# Altium PCB 大松PCB1.PcbDoc
Units mil, origin at the board's own origin, x right, y up, seen from the top; angles counter-clockwise.
Board outline 3425.03 x 1845.03 mil, 2 copper layers (Top Layer, Bottom Layer); 49 components, 33 nets, 134 pads, 200 vias.
Unrouted connection lines stored in the file: 28.
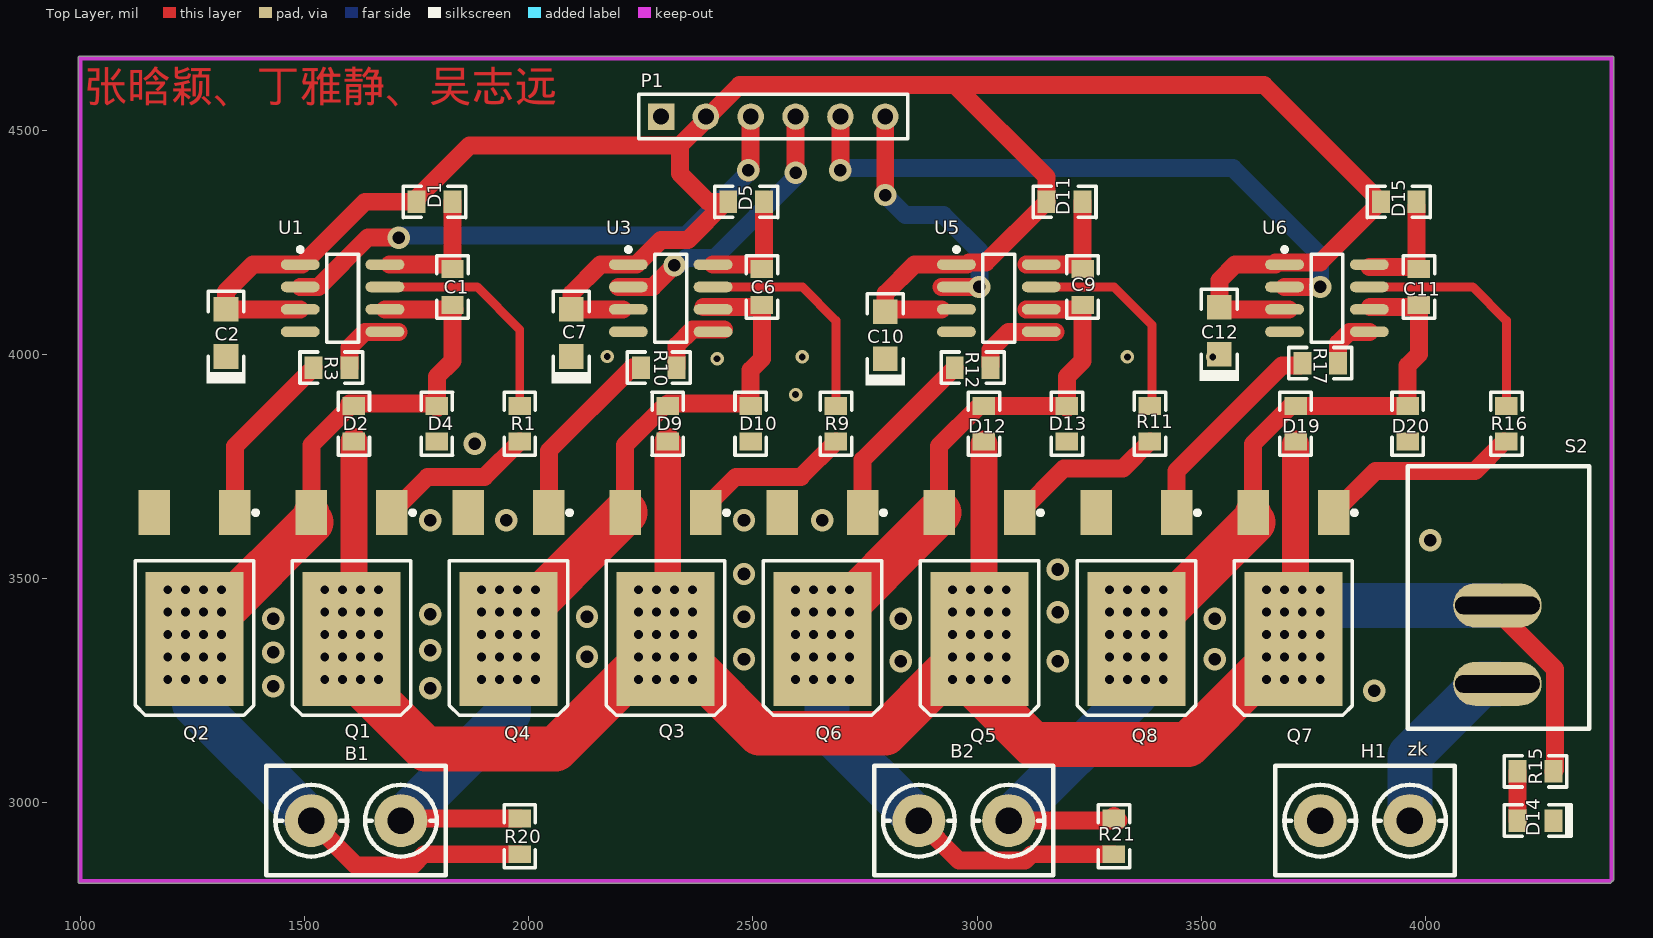
[diagram p0: Top Layer view]
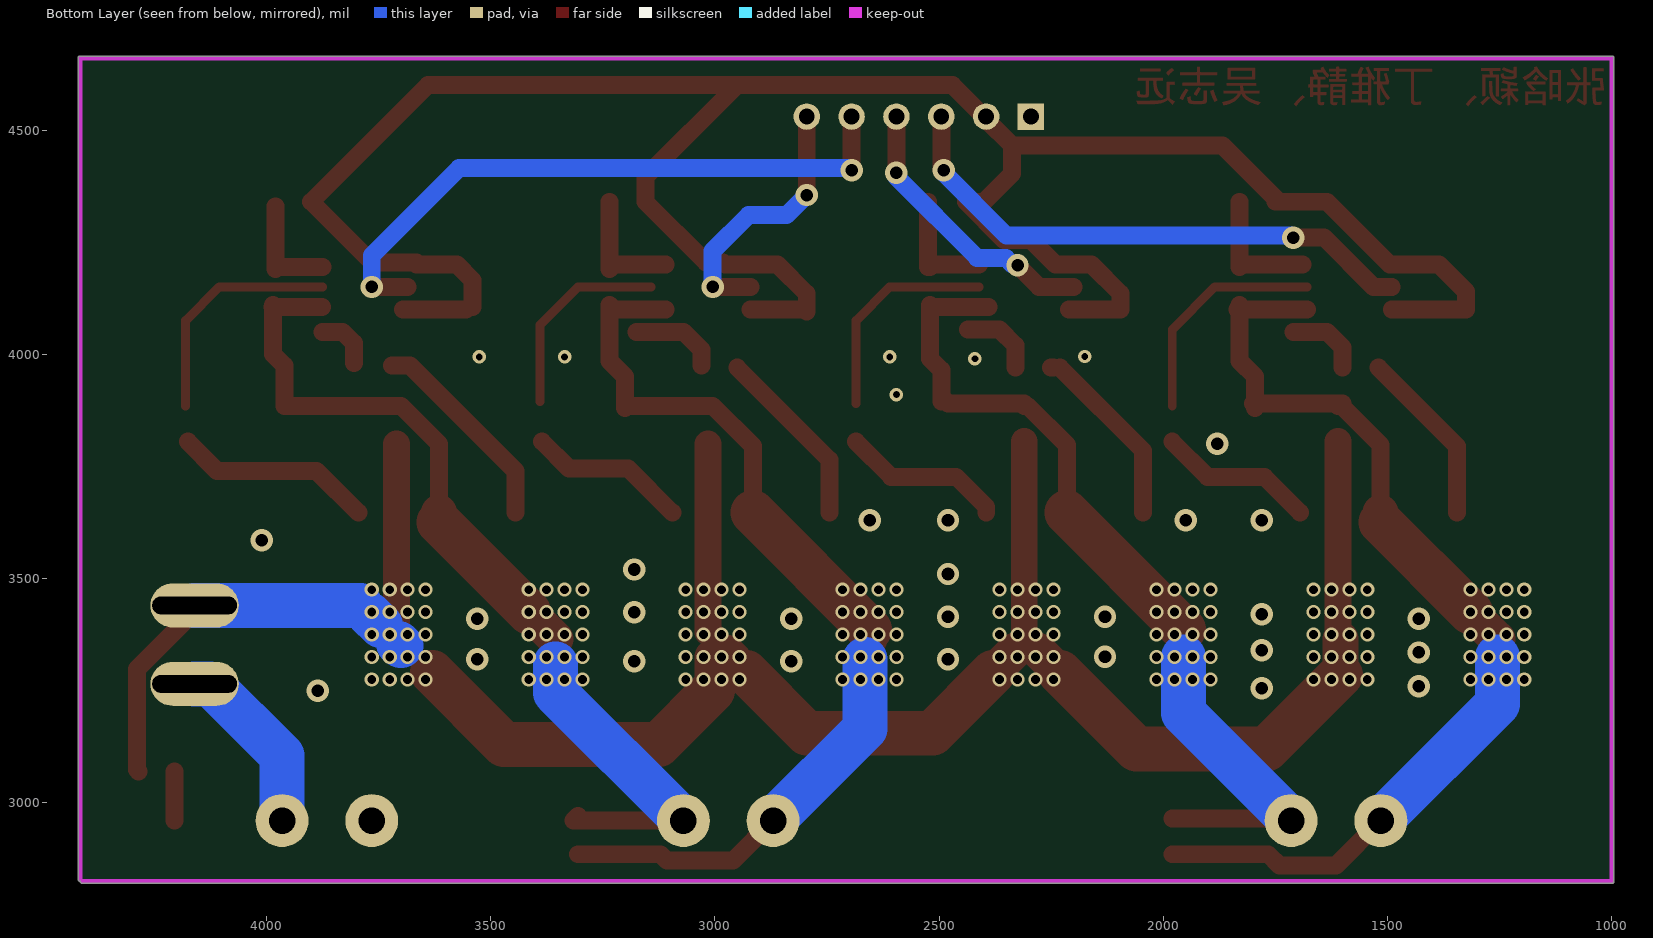
[diagram p1: Bottom Layer view, seen from below]

## Layer stack, top to bottom
Top Layer: signal copper 1.4
Dielectric: dielectric 12.6, FR-4, Dk 4.8
Bottom Layer: signal copper 1.4

## Board outline
1000,2819.99 cw(c1000,2825) 994.99,2825 994.99,4660 cw(c1000,4660) 1000,4665.02 4415,4665.02 cw(c4415,4660) 4420.02,4660 4420.02,2830 cw(c4415,2830) 4418.53,2826.44 cw(c4415,2830) 4415.02,2824.99 cw(c4410,2825) 4413.56,2821.47 cw(c4410,2825) 4410,2819.99

## Design rules (kind name [scope] priority, off if disabled: settings)
Clearance [All] p1: gap=10
PolygonConnect [All] p1: connectstyle=Relief reliefconductorwidth=10 reliefentries=4 polygonreliefangle="90 Angle" airgapwidth=10
RoutingVias [All] p1: holewidth=28 width=50 viastyle="Through Hole" minholewidth=28 minwidth=50 maxholewidth=28 maxwidth=50
SolderMaskExpansion [All] p1: expansion=4
Width [All] p1: maxlimit=100 minlimit=1 preferedwidth=10 minimp=50.000000 maximp=50.000000 favimp=50.000000
28 further rules are at their usual default settings.

## Components (designator, comment, footprint, x,y, rotation, side; value= is the part's Value field where it differs from the comment)
B1 "Motor" KF301-2P 1615,2960 r270 top
B2 "Motor" KF301-2P 2970,2960 r270 top
C1 "Cap" 0805(2012) 1830,4150 r270 top
C2 "Cap Pol1" SOD-323(0805) 1325,4045 r270 top
C6 "Cap" 0805(2012) 2520,4150 r270 top
C7 "Cap Pol1" SOD-323(0805) 2095,4045 r270 top
C9 "Cap" 0805(2012) 3235,4150 r270 top
C10 "Cap Pol1" SOD-323(0805) 2795,4040 r270 top
C11 "Cap" 0805(2012) 3985,4150 r270 top
C12 "Cap Pol1" SOD-323(0805) 3540,4050 r270 top
D1 "1N5819" 0805(2012) 1790,4340 r180 top
D2 "1N5819" 0805(2012) 1610,3845 r90 top
D4 "1N5819" 0805(2012) 1795,3845 r270 top
D5 "1N5819" 0805(2012) 2485,4340 r180 top
D9 "1N5819" 0805(2012) 2310,3845 r90 top
D10 "1N5819" 0805(2012) 2495,3845 r270 top
D11 "1N5819" 0805(2012) 3195,4340 r180 top
D12 "1N5819" 0805(2012) 3015,3845 r90 top
D13 "1N5819" 0805(2012) 3200,3845 r270 top
D14 "RED" 0805LED 4245,2960 r0 top
D15 "1N5819" 0805(2012) 3940,4340 r180 top
D19 "1N5819" 0805(2012) 3710,3845 r90 top
D20 "1N5819" 0805(2012) 3960,3845 r270 top
H1 "POWER IN" KF301-2P 3865,2960 r270 top
P1 "PWM" HDR1X6 2295,4530 r0 top
Q1 "IR7843" LR7843 1605,3505 r90 top
Q2 "IR7843" LR7843 1255,3505 r90 top
Q3 "IR7843" LR7843 2305,3505 r90 top
Q4 "IR7843" LR7843 1955,3505 r90 top
Q5 "IR7843" LR7843 3005,3505 r90 top
Q6 "IR7843" LR7843 2655,3505 r90 top
Q7 "IR7843" LR7843 3705,3505 r90 top
Q8 "IR7843" LR7843 3355,3505 r90 top
R1 "Res2" 0805(2012) 1980,3845 r270 top
R3 "Res2" 0805(2012) 1560,3970 r180 top
R9 "Res2" 0805(2012) 2685,3845 r270 top
R10 "Res2" 0805(2012) 2290,3970 r180 top
R11 "Res2" 0805(2012) 3385,3845 r270 top
R12 "Res2" 0805(2012) 2990,3970 r180 top
R15 "Res2" 0805(2012) 4245,3070 r180 top
R16 "Res2" 0805(2012) 4180,3845 r270 top
R17 "Res2" 0805(2012) 3765,3980 r180 top
R20 "Res Varistor" 0805 1980,2925 r270 top
R21 "Res Varistor" 0805 3305,2925 r270 top
S2 "zk" SWITCH 4365,3165 r180 top
U1 "IR2104S" IR2104S 1585,4125 r0 top
U3 "IR2104S" IR2104S 2316.67,4125 r0 top
U5 "IR2104S" IR2104S 3048.33,4125 r0 top
U6 "IR2104S" IR2104S 3780,4125 r0 top

## Footprints (in the part's own frame and the unit in brackets; to place one, negate y for a bottom-side part, rotate by r counter-clockwise, add the part's x,y. Pads: shape width x height; smd on the part's side, far side on the other; paste and mask are expansions set on the pad)
0805 [mil]
  rect 40x50 smd: 1(-40,0) 2(40,0)
  silkscreen extent -70,-35 70,35
0805(2012) [mil]
  rect 40x50 smd: 1(-40,0) 2(40,0)
  silkscreen extent -70,-35 70,35
0805LED [mil]
  rect 40x50 smd: 1(-40,0) 2(40,0)
  silkscreen extent -70,-35 80,35
HDR1X6 [mm] "Connector; Header; 6 Position"
  rect 1.5x1.5 hole 0.9: 1(0,0)
  round 1.5 hole 0.9: 2(2.54,0) 3(5.08,0) 4(7.62,0) 5(10.16,0) 6(12.7,0)
  silkscreen extent -1.27,-1.27 13.97,1.27
IR2104S [mm]
  oval 2.2x0.6 smd: 1(-2.4,1.905) 2(-2.4,0.635) 3(-2.4,-0.635) 4(-2.4,-1.905) 5(2.4,-1.905) 6(2.4,-0.635) 7(2.4,0.635) 8(2.4,1.905)
  silkscreen extent -2.52,-2.5 0.9,2.88, body extent -2,-2.5 2,2.5, height 1.55
KF301-2P [mm]
  round 3 hole 1.5: 1(0,-2.54) 2(0,2.54)
  silkscreen extent -3.1,-5.08 3.1,5.08
LR7843 [mm]
  rect 2.54x1.778 smd: 1(3.6,-2.28) 3(3.6,2.28)
  rect 7.6x5.55 smd: 2(-3.556,0)
  silkscreen extent -7.87,-3.58 3.72,3.35
SOD-323(0805) [mil]
  rect 55x55 smd: 1(-55,0) 2(50,0)
  silkscreen extent -95,-44 110,44
SWITCH [mm]
  oval 5x2.5 hole 1 slot 4.8 at 0 deg: 1(5.207,-2.54) 2(5.207,-6.985)
  silkscreen extent 0,-14.86 10.29,0

## Part data
B1 B2: library part "Motor Servo", "Servo Motor"
C1 C6 C9 C11: "Capacitor"
C2 C7 C10 C12: "Polarized Capacitor (Radial)"
D1 D2 D4 D5 D9 D10 D11 D12 D13 D15 D19 D20: library part 1N4148, "Silicon Epitaxial Planar Diode for Various Detector, Modulator, Demodulator"
D14: library part LED2, "Typical RED, GREEN, YELLOW, AMBER GaAs LED"
P1: library part "Header 6", "Header, 6-Pin"
Q1 Q2 Q3 Q4 Q5 Q6 Q7 Q8: "N-Channel Power MOSFET"
R1 R3 R9 R10 R11 R12 R15 R16 R17: "Resistor"
R20 R21: "Varistor (Voltage-Sensitive Resistor)"
S2: library part SW-SPST, "Single-Pole, Single-Throw Switch"

## Via types
v1: diameter 31.5, hole 19.68, Top Layer to Bottom Layer, 160 vias
v2: diameter 50, hole 28, Top Layer to Bottom Layer, 33 vias
v3: diameter 30, hole 15, Top Layer to Bottom Layer, 7 vias

## Nets (pads, with @x,y where several pads share a name; then routed paths per layer and width w, separated by ;. In a path a pad name is that pad's centre, name@x,y a point inside that pad or via, vN(x,y) a via of type N, cw(c..) or ccw(c..) an arc to the next point about the centre after c; other vN are vias at no path point)
12V: C2.1 C7.1 C10.1 C12.1 D1.2 D5.2 D11.2 D15.2 P1.2 U1.1 U1.3 U3.1 U3.3 U5.1 U5.3 U6.1 U6.3 | length 5444.3
  Top Layer w40: U1.3 C2.1 1325,4140 1385,4200 U1.1 1495,4200 1635,4340 D1.2 1750,4347.43 1868.05,4465.47 2336.95,4465.47 ; U3.3@2210.51,4100 C7.1 2095,4135 2160,4200 U3.1 2240,4200 2295,4255 2355,4255 2440,4340 2400,4340 2336.95,4403.05 2336.95,4465.47 ; U5.3@2920.51,4100 2800,4100 C10.1 2795,4135 2860,4200 U5.1 2977.22,4200 2982.22,4205 3020,4205 D11.2 3155,4395 2950,4600 ; C12.1 3540,4165 3575,4200 U6.1@3665,4200 ; C12.1@3555,4100 U6.3@3695.51,4100 ; U6.1@3665,4205 3765,4205 D15.2 3640,4600 2950,4600 ; 2336.95,4465.47 2395,4523.52 2395,4525 2470,4600 2950,4600
GND: C2.2 C7.2 C10.2 C12.2 D4.2 D10.2 D13.2 D14.2 D20.2 H1.1 P1.1 Q2.3 Q4.3 Q6.3 Q8.3 U1.4 U3.4 U5.4 U6.4
  other v2: 1780,3630 1950,3630 2480,3630 2655,3630 1880,3800
  other v3: 2595,3910 2420,3990 2610,3994 2610,3994 3335,3994 3525,3994 2175,3995
"MOTOR IN1": P1.6 U5.2 | length 598.3
  Top Layer w40: v2@2790,4355 2795,4360 P1.6@2795,4525 ; U5.2@2920.51,4150 v2(3005,4150)
  Bottom Layer w40: v2(2795,4355) 2840,4310 2925,4310 3005,4230 v2(3005,4150)
"MOTOR IN2": P1.5 U6.2 | length 1400.3
  Top Layer w40: v2@2695,4415 P1.5@2695,4525 ; U6.2 v2(3765,4150)
  Bottom Layer w40: v2@2705,4415 3570,4415 3765,4220 v2(3765,4150)
  other v2: 2695,4410
"MOTOR IN3": P1.4 U3.2 | length 617.9
  Top Layer w40: U3.2@2200,4150 U3.2 ; U3.2@2225,4150 2276.73,4150 v2(2325,4198.27) ; v2@2595,4410 P1.4@2595,4525
  Bottom Layer w40: v2@2325,4200 2336.14,4200 2351.14,4215 2415,4215 2595,4395 v2(2595,4405)
"MOTOR IN4": P1.3 U1.2 | length 1232.2
  Top Layer w40: U1.2 1531.14,4150 1641.14,4260 v2(1710,4260) ; v2@2490,4405 2495,4410 P1.3@2495,4525
  Bottom Layer w40: v2(1710,4260) 1715,4265 2350,4265 2490,4405 v2(2490,4410)
NetB1_1: B1.1 C1.2 D2.2 D4.1 Q1.3 Q2.2 R20.2 U1.6 | length 2260.9
  Top Layer w40: B1.1 1615,2860 1740.94,2860 1765.94,2885 R20.2 ; Q1.3 1515.24,3797.66 1602.57,3885 D2.2 ; D2.2@1600,3890 D4.1@1795,3890 ; U1.6 C1.2@1830,4100 ; D4.1@1795,3880 D4.1 D4.1@1795,3890 ; D4.1@1800,3890 D4.1@1795,3890 ; C1.2 C1.2@1830,4100 ; C1.2@1835,4100 C1.2@1830,4100 ; D4.1@1795,3890 1795,3950 1830,3985 C1.2@1830,4100
  Top Layer w80: Q2.2 v1(1315,3425) ; Q1.3@1515.24,3625.24 Q1.3
  Top Layer w100: v1(1315,3425) Q1.3@1515.24,3625.24
  Bottom Layer w100: 1255,3325 1255,3220 B1.1
  other v1: 1195,3275 1235,3275 1275,3275 1315,3275 1195,3325 1235,3325 1275,3325 1315,3325 1195,3375 1235,3375 1275,3375 1315,3375 1195,3425 1235,3425 1275,3425 1195,3475 1235,3475 1275,3475 1315,3475
NetB1_2: B1.2 C6.2 D9.2 D10.1 Q3.3 Q4.2 R20.1 U3.6 | length 1949.6
  Top Layer w40: B1.2 1720,2965 R20.1 ; Q3.3 2215,3646.97 2215,3797.43 2302.57,3885 D9.2@2305,3885 ; D9.2 D9.2@2305,3885 ; U3.6@2390,4105 C6.2@2520,4105 ; D10.1@2490,3900 2480,3890 2310,3890 D9.2@2305,3885 ; D10.1@2495,3895 2495,3965 2520,3990 C6.2@2520,4105 ; C6.2 C6.2@2520,4105
  Top Layer w80: Q4.2 Q4.2@1955,3386.5
  Top Layer w100: Q4.2@1955,3386.5 Q3.3
  Bottom Layer w100: B1.2 1955,3200 1955,3325
  other v1: 1895,3275 1935,3275 1975,3275 2015,3275 1895,3325 1935,3325 1975,3325 2015,3325 1895,3375 1935,3375 1975,3375 2015,3375 1895,3425 1935,3425 1975,3425 2015,3425 1895,3475 1935,3475 1975,3475 2015,3475
NetB2_1: B2.1 C9.2 D12.2 D13.1 Q5.3 Q6.2 R21.2 U5.6 | length 2156.7
  Top Layer w40: B2.1 2959.06,2870.94 3106.89,2870.94 3120.94,2885 R21.2 ; Q5.3 2915.24,3795.24 3005,3885 D12.2 D13.1 ; U5.6@3109.49,4100 U5.6 3225,4100 C9.2 3235,3985 3200,3950 D13.1 ; D13.1@3200,3880 D13.1
  Top Layer w80: Q6.2 Q6.2@2655,3386.5
  Top Layer w100: Q6.2@2655,3386.5 Q5.3
  Bottom Layer w100: v1@2665,3320 2665,3165 B2.1
  other v1: 2595,3275 2635,3275 2675,3275 2715,3275 2595,3325 2635,3325 2675,3325 2715,3325 2595,3375 2635,3375 2675,3375 2715,3375 2595,3425 2635,3425 2675,3425 2715,3425 2595,3475 2635,3475 2675,3475 2715,3475
NetB2_2: B2.2 C11.2 D19.2 D20.1 Q7.3 Q8.2 R21.1 U6.6 | length 1990.5
  Top Layer w40: B2.2 3315,2960 R21.1@3305,2970 ; Q7.3 3615.24,3800.24 3700,3885 D19.2@3705,3885 ; D19.2 D20.1 ; U6.6@3875.87,4105 C11.2@3985,4105 ; D20.1@3960,3890 3960,3975 3985,4000 C11.2@3985,4105 ; C11.2@3983.19,4108.19 C11.2@3985,4106.38 ; C11.2 C11.2@3985,4106.38 ; C11.2@3985,4105 C11.2@3985,4106.38 ; C11.2@3985,4105 3986.38,4105 C11.2@3985,4106.38
  Top Layer w80: Q8.2 v1(3415,3425) ; Q7.3@3615.24,3625.24 Q7.3
  Top Layer w100: v1(3415,3425) Q7.3@3615.24,3625.24
  Bottom Layer w100: B2.2 3355,3245 3355,3310
  other v1: 3295,3275 3335,3275 3375,3275 3415,3275 3295,3325 3335,3325 3375,3325 3415,3325 3295,3375 3335,3375 3375,3375 3415,3375 3295,3425 3335,3425 3375,3425 3295,3475 3335,3475 3375,3475 3415,3475
NetC1_1: C1.1 D1.1 U1.8 | length 280.5
  Top Layer w40: U1.8@1689.49,4200 C1.1@1825,4200 ; C1.1@1830,4195 D1.1
NetC6_1: C6.1 D5.1 U3.8 | length 253.8
  Top Layer w40: U3.8 C6.1@2510,4200 ; C6.1@2520,4195 C6.1@2520,4205 ; C6.1@2525,4195 D5.1
NetC9_1: C9.1 D11.1 U5.8 | length 279.7
  Top Layer w40: U5.8@3109.49,4200 3225,4200 C9.1 D11.1
NetC11_1: C11.1 D15.1 U6.8 | length 230.5
  Top Layer w40: U6.8@3874.49,4195 C11.1@3965,4195 ; C11.1@3980,4190 D15.1@3980,4330
NetD14_1: D14.1 R15.2 | length 110
  Top Layer w40: D14.1 R15.2
NetH1_2: H1.2 S2.1 | length 406.3
  Bottom Layer w100: H1.2 3965,3105 4125,3265 S2.1
NetQ1_1: Q1.1 R1.2 | length 350.8
  Top Layer w40: Q1.1 1774.76,3726.73 1901.73,3726.73 R1.2
NetQ2_1: Q2.1 R3.2 | length 395.9
  Top Layer w40: Q2.1 1344.76,3794.76 R3.2
NetQ3_1: Q3.1 R9.2 | length 363.4
  Top Layer w40: Q3.1 2394.76,3659.76 2461.73,3726.73 2606.73,3726.73 R9.2
NetQ4_1: Q4.1 R10.2 | length 405
  Top Layer w40: Q4.1 2044.76,3784.76 R10.2@2230,3970 ; R10.2@2245,3970 R10.2
NetQ5_1: Q5.1 R11.2 | length 355.8
  Top Layer w40: Q5.1 3193.03,3745 3325,3745 R11.2
NetQ6_1: Q6.1 R12.2 | length 408.3
  Top Layer w40: Q6.1 2744.76,3764.76 R12.2
NetQ7_1: Q7.1 R16.2 | length 445.8
  Top Layer w40: Q7.1 3888.03,3740 4110,3740 R16.2@4175,3805
NetQ8_1: Q8.1 R17.2 | length 465.7
  Top Layer w40: Q8.1 3444.76,3739.76 3680,3975 R17.2@3720,3975
NetR1_1: R1.1 U1.7 | length 509.9
  Top Layer w20: U1.7 1885,4150 1980,4055 R1.1
NetR3_1: R3.1 U1.5 | length 169.5
  Top Layer w40: R3.1 1600,4015 1635,4050 U1.5 U1.5@1710,4050
NetR9_1: R9.1 U3.7 | length 489.9
  Top Layer w20: U3.7 2610,4150 2685,4075 R9.1@2685,3890
NetR10_1: R10.1 U3.5 | length 169.5
  Top Layer w40: R10.1 2330,4020 2365,4055 U3.5@2435,4055
NetR11_1: R11.1 U5.7 | length 452.4
  Top Layer w20: U5.7 3305,4150 3390,4065 R11.1@3390,3895
NetR12_1: R12.1 U5.5 | length 196.6
  Top Layer w40: R12.1@3030,3975 3030,4010 3070,4050 3100,4050 U5.5 U5.5@3175,4050
NetR16_1: R16.1 U6.7 | length 526.6
  Top Layer w20: U6.7 4105,4150 4180,4075 R16.1
NetR17_1: R17.1 U6.5 | length 124.8
  Top Layer w40: R17.1 3805,4025 3830,4050 U6.5
VBAT: D2.1 D9.1 D12.1 D19.1 Q1.2 Q3.2 Q5.2 Q7.2 R15.1 S2.2 | length 4955.9
  Top Layer w40: Q3.2@2300,3370 Q3.2@2310,3380 ; Q5.2@2995,3375 Q5.2@3005,3385 ; S2.2 4160,3426.24 4288.43,3297.81 4288.43,3073.43 R15.1
  Top Layer w60: Q1.2@1610,3390 D2.1 ; Q3.2@2310,3380 D9.1 ; Q5.2@3015,3380 D12.1@3015,3800 ; Q7.2@3710,3365 D19.1@3710,3800
  Top Layer w80: Q1.2@1605,3285 Q1.2 ; Q3.2@2255,3315 Q3.2@2280,3340 ; Q3.2@2330,3340 Q3.2@2355,3315 ; Q5.2@2955,3315 Q5.2@2975,3335 ; Q5.2@3005,3275 Q5.2@3005,3325
  Top Layer w100: Q1.2@1605,3285 1770,3120 2060,3120 Q3.2@2230,3290 ; Q3.2@2380,3290 2515,3155 2795,3155 Q5.2@2930,3290 ; Q5.2@3005,3250 3125,3130 3470,3130 Q7.2@3630,3290
  Bottom Layer w100: 3700,3350 3705,3355 ; 3745,3395 v1@3770,3420 ; 3790,3440 S2.2
  other v1: 1545,3275 1585,3275 1625,3275 1665,3275 2245,3275 2285,3275 2325,3275 2365,3275 2945,3275 2985,3275 3025,3275 3065,3275 3645,3275 3685,3275 3725,3275 3765,3275 1545,3325 1585,3325 1625,3325 1665,3325 2245,3325 2285,3325 2325,3325 2365,3325 2945,3325 2985,3325 3025,3325 3065,3325 3645,3325 3685,3325 3725,3325 3765,3325 1545,3375 1585,3375 1625,3375 1665,3375 2245,3375 2285,3375 2325,3375 2365,3375 2945,3375 2985,3375 3025,3375 3065,3375 3645,3375 3685,3375 3725,3375 3765,3375 1545,3425 1585,3425 1625,3425 1665,3425 2245,3425 2285,3425 2325,3425 2365,3425 2945,3425 2985,3425 3025,3425 3065,3425 3645,3425 3685,3425 3725,3425 3765,3425 1545,3475 1585,3475 1625,3475 1665,3475 2245,3475 2285,3475 2325,3475 2365,3475 2945,3475 2985,3475 3025,3475 3065,3475 3645,3475 3685,3475 3725,3475 3765,3475
copper on no net:
  other v2: 3885,3250 1780,3255 1430,3260 2830,3315 3180,3315 2480,3320 3530,3320 2130,3325 1430,3335 1780,3340 1430,3410 2830,3410 3530,3410 2130,3415 2480,3415 1780,3420 3180,3425 2480,3510 3180,3520 4010,3585

## Keep-outs
Keep-Out Layer:
  lines w10: 3910,2825 4410,2825 ; 3925,2825 2990,2825 1000,2825 1000,4050 1000,4640 1000,4660 4415,4660 4415,4630 4415,4050 4415,2830

## Other copper
Top Layer:
  text "张晗颖、丁雅静、吴志远" at 1010,4540 h120

## Silkscreen, mask and mechanical layers (free items; w line width, h text height)
Bottom Solder:
  lines w10: 4410,2825 4415,2830